# Altium PCB yhh.PcbDoc
Units mm, origin at the board's own origin, x right, y up, seen from the top; angles counter-clockwise.
Board outline 100 x 100 mm, 2 copper layers (Top Layer, Bottom Layer); 49 components, 70 nets, 270 pads, 114 vias.
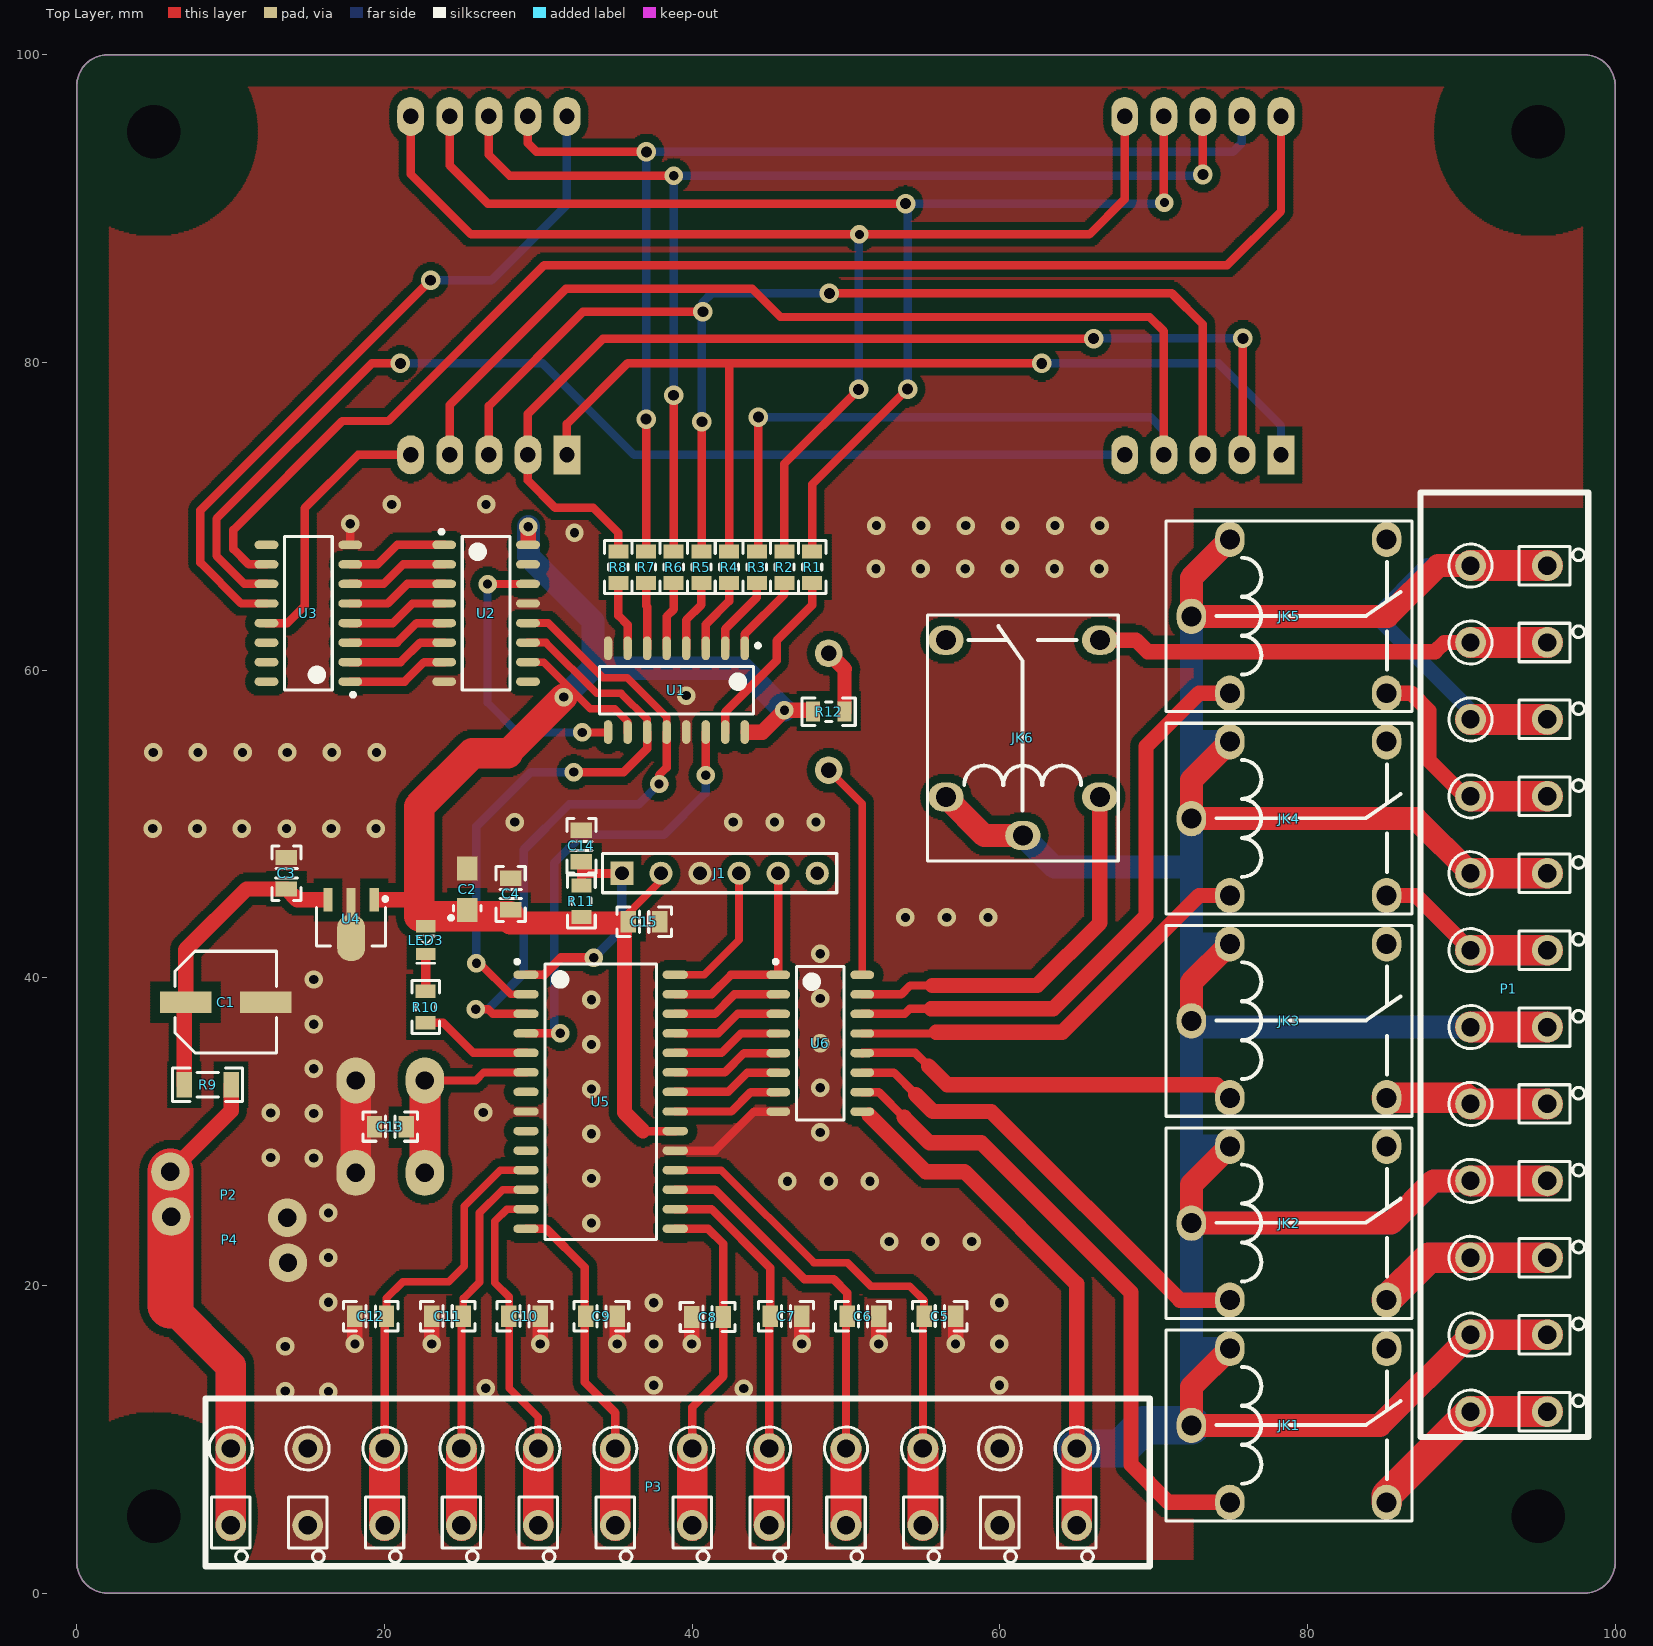
[diagram p0: Top Layer view]
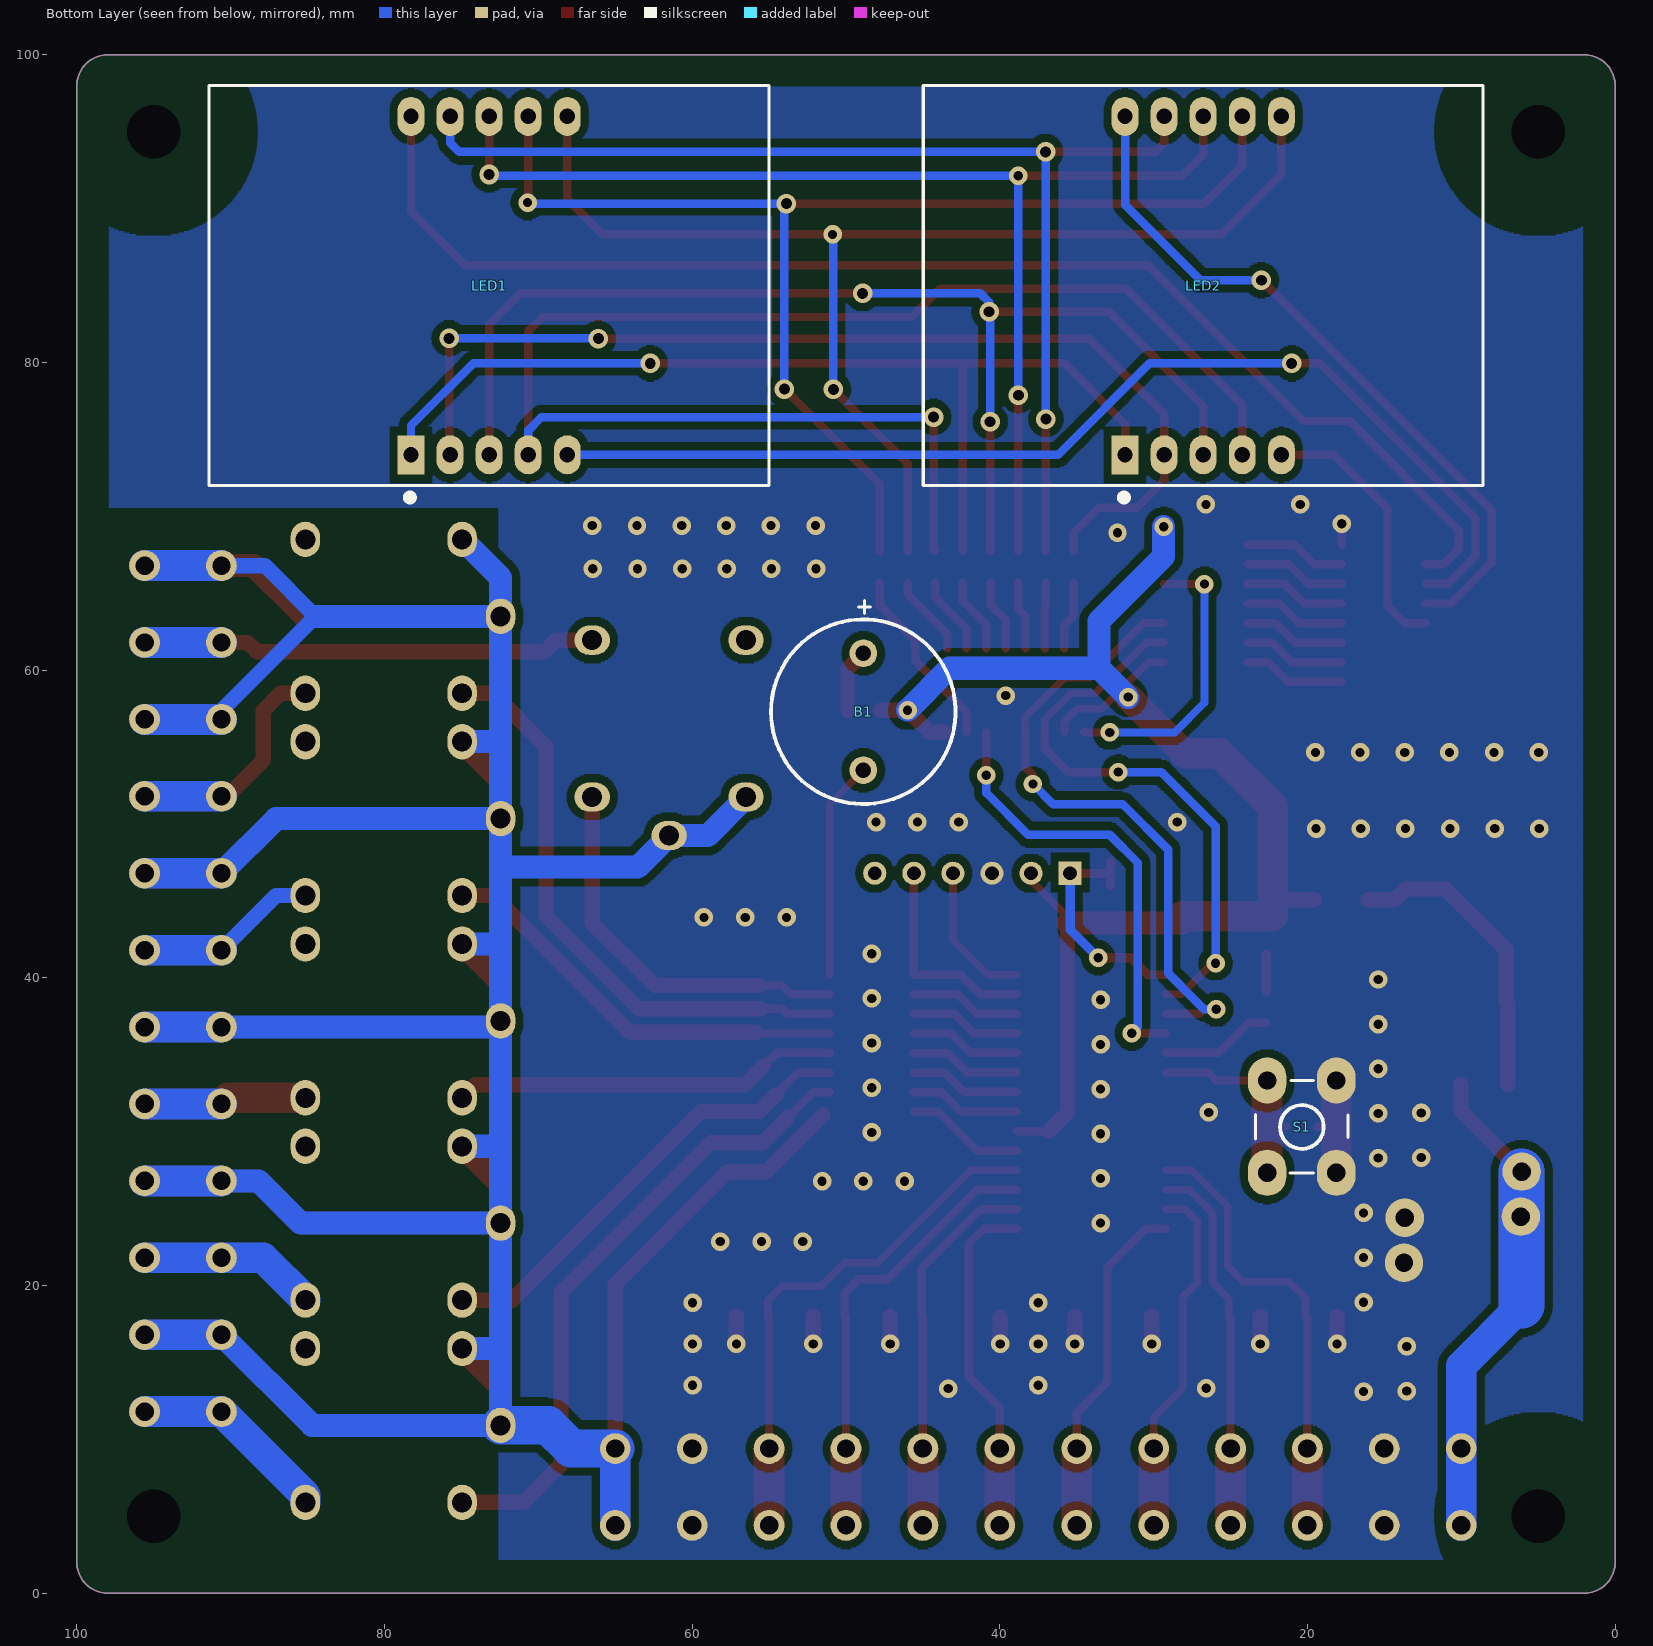
[diagram p1: Bottom Layer view, seen from below]

## Layer stack, top to bottom
Top Solder: solder mask 0.0102, Solder Resist, Dk 3.5
Top Layer: signal copper 0.0356
Dielectric 1: dielectric 0.32, FR-4, Dk 4.8
Bottom Layer: signal copper 0.0356
Bottom Solder: solder mask 0.0102, Solder Resist, Dk 3.5

## Board outline
0,2 0,98 cw(c2,98) 2,100 98,100 cw(c98,98) 100,98 100,2 cw(c98,2) 98,0 2,0 cw(c2,2)

## Design rules (kind name [scope] priority, off if disabled: settings)
Clearance Clearance_2 [IsKeepOut] p1: gap=2 ignorepadtopadclearanceinfootprint=FALSE
Clearance Clearance_1 [HasPad('Free-1')] p2: gap=5 ignorepadtopadclearanceinfootprint=FALSE
Clearance [All] p3: gap=0.5 ignorepadtopadclearanceinfootprint=FALSE except(0.6: SMDPad-Poly Poly-Poly)
PlaneConnect [All] p1: planeconnectstyle=Direct reliefexpansion=0.508 reliefentries=4 reliefconductorwidth=0.254 reliefairgap=0.254
PolygonConnect [All] p1: connectstyle=Direct reliefconductorwidth=0.254 reliefentries=4 polygonreliefangle="90 Angle" airgapwidth=0.254
RoutingVias [All] p1: holewidth=0.711 width=1.27 viastyle="Through Hole" minholewidth=0.711 minwidth=1.27 maxholewidth=0.711 maxwidth=1.27
SolderMaskExpansion [All] p1: expansion=0.102
Width [All] p1: maxlimit=5 minlimit=0.5 preferedwidth=0.55
29 further rules are at their usual default settings.

## Components (designator, comment, footprint, x,y, rotation, side; value= is the part's Value field where it differs from the comment)
B1 "BEEP" BUZZ 48.875,57.3 r270 bottom
C1 "Cap Pol" CAL6.3x8 9.675,38.425 r180 top value=100uF
C2 "Cap Pol" TA3216 25.375,45.75 r270 top value=100uF
C3 "0.1uF" C0805(2012) 13.625,46.8 r90 top
C4 "0.1uF" C0805(2012) 28.2,45.45 r90 top
C5 "0.1uF" C0805(2012) 56.1,18 r180 top
C6 "0.1uF" C0805(2012) 51.1,18 r0 top
C7 "0.1uF" C0805(2012) 46.1,18 r180 top
C8 "0.1uF" C0805(2012) 41,17.95 r0 top
C9 "0.1uF" C0805(2012) 34.1,18 r0 top
C10 "0.1uF" C0805(2012) 29.1,18 r180 top
C11 "0.1uF" C0805(2012) 24.1,18 r180 top
C12 "0.1uF" C0805(2012) 19.1,18 r0 top
C13 "0.1uF" C0805(2012) 20.375,30.325 r180 top
C14 "0.1uF" C0805(2012) 32.8,48.575 r90 top
C15 "0.1uF" C0805(2012) 36.875,43.65 r0 top
J1 "ISP" HDR1X6 41.78,46.8 r0 top
JK1 "SRB" RELAY_SRA 78.8,10.9 r180 top
JK2 "SRB" RELAY_SRA 78.8,24.05 r180 top
JK3 "SRB" RELAY_SRA 78.8,37.2 r180 top
JK4 "SRB" RELAY_SRA 78.8,50.35 r180 top
JK5 "SRB" RELAY_SRA 78.8,63.5 r180 top
JK6 "SRB" RELAY_SRA 61.5,55.6 r270 top
LED1 "Green" LED_KRS-8201CPG-3.5 73.2,85 r180 bottom
LED2 "Green" LED_KRS-8201CPG-3.5 26.78,85 r180 bottom
LED3 "LED" LED_0805 22.675,42.45 r90 top
P1 "Header 12" CON_DEGSON236_5_12P 93.1,39.3 r90 top
P2 "Header 2" HDR1X2 8.85,24.3 r180 top
P3 "Header 12" CON_DEGSON236_5_12P 37.5,6.9 r0 top
P4 "Header 12" HDR1X2 10.95,24.575 r0 top
R1 "330" R0805(2012) 47.8,66.7 r90 top
R2 "330" R0805(2012) 46,66.7 r90 top
R3 "330" R0805(2012) 44.2,66.7 r90 top
R4 "330" R0805(2012) 42.4,66.7 r90 top
R5 "330" R0805(2012) 40.6,66.7 r90 top
R6 "330" R0805(2012) 38.8,66.7 r90 top
R7 "330" R0805(2012) 37,66.7 r90 top
R8 "330" R0805(2012) 35.2,66.7 r90 top
R9 "100" R1206(3216) 8.5,33.05 r180 top
R10 "1K" R0805(2012) 22.675,38.1 r90 top
R11 "1K" R0805(2012) 32.8,44.975 r90 top
R12 "10" R0805(2012) 48.875,57.3 r0 top
S1 "SW-PB4" KEY_6x6 20.375,30.325 r270 bottom
U1 "74HC595" SOP16 38.975,58.7 r180 top
U2 "74HC595" SOP16 26.6,63.7 r270 top
U3 "ULN2003L" SOP16 15.05,63.7 r90 top
U4 "LM78L05" SOT89_3L 17.825,45 r90 top
U5 "PIC16F873A-I/SO" SOP28 34.05,31.945 r270 top
U6 "ULN2003L" SOP16 48.325,35.745 r270 top

## Footprints (in the part's own frame and the unit in brackets; to place one, negate y for a bottom-side part, rotate by r counter-clockwise, add the part's x,y. Pads: shape width x height; smd on the part's side, far side on the other; paste and mask are expansions set on the pad)
BUZZ [mm]
  round 1.8 hole 1: 1(-3.8,0) 2(3.8,0)
  silkscreen extent -7.23,-6 6,6
C0805(2012) [mm] "Chip Capacitor, 2-Leads, Body 2.00x1.25mm, IPC Medium Density"
  rect 1x1.4 smd: 1(-1.025,0) 2(1.025,0)
  silkscreen extent -1.78,-0.95 1.77,0.95
CAL6.3x8 [mm] "Aluminum Electrolytic Capacitor, Body 6.60x6.60x8.00mm, IPC High Density"
  rect 3.35x1.4 smd: 1(2.6,0) 2(-2.6,0)
  silkscreen extent -3.3,-3.3 3.3,3.3
CON_DEGSON236_5_12P [mm]
  round 2 hole 1.2 unplated: 1(-27.5,-2.5) 1(-27.5,2.5) 2(-22.5,-2.5) 2(-22.5,2.5) 3(-17.5,2.5) 3(-17.5,-2.5) 4(-12.5,-2.5) 4(-12.5,2.5) 5(-7.5,-2.5) 5(-7.5,2.5) 6(-2.5,-2.5) 6(-2.5,2.5) 7(2.5,2.5) 7(2.5,-2.5) 8(7.5,-2.5) 8(7.5,2.5) 9(12.5,2.5) 9(12.5,-2.5) 10(17.5,-2.5) 10(17.5,2.5) 11(22.5,2.5) 11(22.5,-2.5) 12(27.5,-2.5) 12(27.5,2.5)
  silkscreen extent -29.15,-5.15 32.25,5.75
HDR1X2 [mm] "Connector; Header; 2 Position"
  round 2.5 hole 1.2 paste+0: 1(-4.825,-0.1)
  round 2.5 hole 1.2: 2(2.775,-3.1)
HDR1X6 [mm] "Connector; Header; 6 Position"
  rect 1.5x1.5 hole 0.9: 1(-6.35,0)
  round 1.5 hole 0.9: 2(-3.81,0) 3(-1.27,0) 4(1.27,0) 5(3.81,0) 6(6.35,0)
  silkscreen extent -7.62,-1.27 7.62,1.27
KEY_6x6 [mm]
  oval 3x2.5 hole 1.2: 1(-3,-2.25) 1(3,-2.25) 2(-3,2.25) 2(3,2.25)
  silkscreen extent -3,-3 3,3
LED_0805 [mm]
  rect 0.8x1.25 smd: 1(0.9,0) 2(-0.9,0)
  silkscreen extent -1.5,-0.6 0.3,0.6
LED_KRS-8201CPG-3.5 [mm]
  rect 1.75x2.54 hole 1: 1(-5.08,-11)
  oval 1.75x2.54 hole 1: 2(-2.54,-11) 3(0,-11) 4(2.54,-11) 5(5.08,-11) 6(5.08,11) 7(2.54,11) 8(0,11) 9(-2.54,11) 10(-5.08,11)
  silkscreen extent -18.2,-13.97 18.2,13
R0805(2012) [mm] "Chip Resistor, 2-Leads, Body 2.00x1.25mm, IPC Medium Density"
  rect 0.9x1.3 smd: 1(-1.025,0) 2(1.025,0)
  silkscreen extent -1.73,-0.9 1.73,0.9
R1206(3216) [mm] "Chip Resistor, 2-Leads, Body 3.20x1.60mm, IPC Medium Density"
  rect 1x1.65 smd: 1(-1.525,0) 2(1.525,0)
  silkscreen extent -2.27,-1.1 2.28,1.1
RELAY_SRA [mm] "JK?"
  oval 1.9x2.3 hole 1.3: 1(6.35,0) 2(3.85,5) 3(-6.35,5) 4(-6.35,-5) 5(3.85,-5)
  silkscreen extent -8,-6.2 8,6.2
SOP16 [mm] "SOP, 16-Leads, Body 10.00x3.90mm, Pitch 1.27mm, IPC Medium Density"
  oval 0.55x1.55 smd: 1(-4.445,-2.725) 2(-3.175,-2.725) 3(-1.905,-2.725) 4(-0.635,-2.725) 5(0.635,-2.725) 6(1.905,-2.725) 7(3.175,-2.725) 8(4.445,-2.725) 9(4.445,2.725) 10(3.175,2.725) 11(1.905,2.725) 12(0.635,2.725) 13(-0.635,2.725) 14(-1.905,2.725) 15(-3.175,2.725) 16(-4.445,2.725)
  silkscreen extent -5.43,-3.02 5,1.55
SOP28 [mm] "SOP, 28-Leads, Body 17.90x7.50mm, Pitch 1.27mm, IPC Medium Density"
  oval 0.55x1.65 smd: 1(-8.255,-4.85) 2(-6.985,-4.85) 3(-5.715,-4.85) 4(-4.445,-4.85) 5(-3.175,-4.85) 6(-1.905,-4.85) 7(-0.635,-4.85) 8(0.635,-4.85) 9(1.905,-4.85) 10(3.175,-4.85) 11(4.445,-4.85) 12(5.715,-4.85) 13(6.985,-4.85) 14(8.255,-4.85) 15(8.255,4.85) 16(6.985,4.85) 17(5.715,4.85) 18(4.445,4.85) 19(3.175,4.85) 20(1.905,4.85) 21(0.635,4.85) 22(-0.635,4.85) 23(-1.905,4.85) 24(-3.175,4.85) 25(-4.445,4.85) 26(-5.715,4.85) 27(-6.985,4.85) 28(-8.255,4.85)
  silkscreen extent -9.22,-5.55 8.95,3.62
SOT89_3L [mm] "SOT89, 3-Leads, Body 4.50x2.45mm, Pitch 1.50mm, Lead Span 3.5mm - Reverse Pinning, IPC Medium Density"
  rect 1.5x0.6 smd: 1(0.075,-1.5) 3(0.075,1.5)
  rrect90% 3x1.8 smd: 2(-2.4,0)
  rect 1.8x0.6 smd: 2(-0.075,0)
  silkscreen extent -2.93,-2.35 0.25,2.25
TA3216 [mm] "Molded Capacitor, 2-Leads, Body 3.20x1.60mm, IPC Medium Density"
  rect 1.55x1.35 smd: 1(1.35,0) 2(-1.35,0)
  silkscreen extent 1.05,-1.17 1.97,0.9

## Part data
C1 C2: "极性钽电容", LatestRevisionDate=17-Jul-2002, LatestRevisionNote="Re-released for DXP Platform.", PackageReference=RB7.6-15, Published=8-Jun-2000, Publisher="Altium Limited"
  C1: Vol=50V
  C2: Vol=16V
C3 C4 C5 C6 C7 C8 C9 C10 C11 C12 C13 C14 C15: library part Cap, "无极性电容", LatestRevisionDate=17-Jul-2002, LatestRevisionNote="Re-released for DXP Platform.", Published=8-Jun-2000, Publisher="Altium Limited"
J1: library part ISP_5
JK1 JK2 JK3 JK4 JK5 JK6: "单刀双掷继电器"
LED1 LED2: library part LED_KRS-8201CPG-3.5, "共阴1寸LED", 段电压(10ｍA)=7
LED3: "发光二极管", LatestRevisionDate=08-Jul-2005, LatestRevisionNote="Mech Layer 1 removed.", PackageReference=LED-0, Published=8-Jun-2000, Publisher="Altium Limited"
P1 P3 P4: "Header, 12-Pin", LatestRevisionDate=17-Jul-2002, LatestRevisionNote="Re-released for DXP Platform.", Publisher="Altium Limited"
P2: "接插件", LatestRevisionDate=17-Jul-2002, LatestRevisionNote="Re-released for DXP Platform.", Publisher="Altium Limited"
R1 R2 R3 R4 R5 R6 R7 R8 R9 R10 R11 R12: library part Res, "Resistor", LatestRevisionDate=17-Jul-2002, PackageDescription="Axial Device, Thru-Hole; 2 Leads; 0.7 in Pin Spacing", Published=8-Jun-2000, Publisher="Altium Limited"
S1: "微动开关", LatestRevisionDate=17-Jul-2002, LatestRevisionNote="Re-released for DXP Platform.", PackageReference=SPST-2, Published=24-Mar-1999, Publisher="Altium Limited"
U1 U2: "移位寄存器", ComponentAvailability="Not for New Design", ComponentLink1Description="Manufacturer Link", ComponentLink1URL=http://www.onsemi.com/, ComponentLink2Description=Datasheet, ComponentLink2URL=http://www.onsemi.com/pub/Collateral/MC74VHC595-D.PDF, DatasheetVersion=1997, LatestRevisionDate=13-Apr-2006, LatestRevisionNote="IPC-7351 Footprint Added.", PackageDescription="16-Pin Small Outline Package 1.27 mm Pitch", PackageReference=966-01, PackageVersion=1997, Published=15-Apr-2002, Publisher="Altium Limited"
U3 U6: "驱动芯片", Code_IPC=SOIC127P600-16, Code_JEDEC=MS-012-AC, ComponentLink1Description="Manufacturer Link", ComponentLink1URL=http://www.allegromicro.com/, DatasheetVersion=1998, LatestRevisionDate=13-Apr-2006, LatestRevisionNote="IPC-7351 Footprint Added.", PackageDescription="16-Pin Small Outline Integrated Circuit 1.27 mm Pitch", PackageReference=L16, Published=13-Oct-2000, Publisher="Altium Limited"
U4: library part LM78LXX
U5: "Enhanced FLASH Microcontroller, 4K (x14-Bit words) FLASH, 192 Bytes RAM, 28-Pin SOIC, Standard VDD Range, Industrial Temperature", Supplier Part Number 1=PIC16F873A-I/SO-ND, Code_JEDEC=MS-013, ComponentAvailability="Unknown. Contact manufacturer to determine status.", ComponentLink1Description=Datasheet, ComponentLink1URL=http://ww1.microchip.com/downloads/en/DeviceDoc/39582b.pdf, ComponentLink2Description="Packaging Specification", ComponentLink2URL=http://www.microchip.com/stellent/groups/techpub_sg/documents/packagingspec/en012702.pdf, ComponentLink3Description="Microchip.com Home", ComponentLink3URL=http://www.microchip.com/, DatasheetVersion="revB, Oct-2003", LatestRevisionDate=29-Jan-2009, LatestRevisionNote="Sch. layout revised. 3D Model Removed.", PackageDescription="28-Lead Plastic Small Outline (SO) - Wide 7.50mm Body [SOIC]", PackageReference=SOIC-SO28, PackageVersion="revBB, Aug-2009", Published=11-Oct-2004, Publisher="Altium Limited", Supplier 1=Digi-Key, Supplier 2=Farnell, Supplier 3=Farnell, Supplier Part Number 2=1660034, Supplier Part Number 3=9761080

## Free pads (board coordinates)
  round 0 hole 3.5 unplated: 1(5,5) 1(5,95) 1(95,5) 1(95,95)

## Via types
v1: diameter 1.2, hole 0.6, Top Layer to Bottom Layer, tented both sides, 98 vias
v2: diameter 1.27, hole 0.711, Top Layer to Bottom Layer, tented both sides, 16 vias

## Nets (pads, with @x,y where several pads share a name; then routed paths per layer and width w, separated by ;. In a path a pad name is that pad's centre, name@x,y a point inside that pad or via, vN(x,y) a via of type N, cw(c..) or ccw(c..) an arc to the next point about the centre after c; other vN are vias at no path point)
+5: C2.1 C4.1 C15.1 J1.2 LED3.1 R11.1 R12.1 U1.10 U1.16 U2.10 U2.16 U4.1 U5.20 | length 102.4
  Top Layer w0.5: U2.10 30.35,60.525 33.375,57.5 34.955,57.5 35.8,56.655 U1.10 ; C15.1 35.85,44.185 37.97,46.305 J1.2
  Top Layer w0.55: 36.8,30.04 U5.20
  Top Layer w1: U4.1@19.55,45.075 22.225,45.075 22.25,45.05 ; U2.16@29.35,68.4 v1(29.35,69.325) ; v1@31.663,58.238 v1(31.65,58.25) v1@31.9,58.5 ; C15.1@35.599,43.75 35.599,31.241 36.8,30.04 ; U1.16@43.65,55.975 44.575,55.975 ; R12.1@47.75,57.4 v1(46,57.4) ; 44.575,55.975 v1(46,57.4) ; 44.575,55.975 v1(46,57.4)
  Top Layer w1.5: 28.175,43.575 C15.1@35.55,43.575
  Top Layer w1.8: 28,54.6 v1(31.65,58.25)
  Top Layer w2: 28,54.6 25.725,54.6 22.25,51.125 22.25,45.05 22.25,44 C4.1@28.125,44
  Bottom Layer w1: v1@31.663,58.238 v1(31.65,58.25) 33.558,60.159
  Bottom Layer w1.5: v1(29.35,69.325) 29.35,67.403 33.558,63.195 33.558,60.159 ; v1@31.663,58.238 33.55,60.125 43.275,60.125 v1(46,57.4)
+24: P2.2 P3.1 P4.1 R9.1 | length 56.5
  Top Layer w1: P2.2 10.025,31.35 R9.1
  Top Layer w2: 6.075,18.7 10,14.775 10,9.4 P3.1@10,4.4
  Top Layer w3: 6.075,18.7 6.075,24.475 P2.2
  Bottom Layer w2: 6.075,18.7 10,14.775 10,9.4 P3.1@10,4.4
  Bottom Layer w3: 6.075,18.7 P2.2
+24_D: JK1.1 JK1.5 JK2.1 JK2.5 JK3.1 JK3.5 JK4.1 JK4.5 JK5.1 JK5.5 JK6.1 JK6.5 P1.2 P1.4 P1.6 P1.8 P1.10 P1.12 P3.12 U6.9 | length 415.1
  Top Layer w1: U6.9@51.514,31.064 55.179,27.4 57.7,27.4 65,20.1 P3.12@65,9.4
  Top Layer w1.5: JK6.5 59,49.25 JK6.1 ; JK3.1 72.45,39.7 JK3.5 ; JK1.5 72.45,13.4 JK1.1 84.7,10.9 P1.2@90.6,16.8 ; JK2.5 72.45,26.55 JK2.1 85.441,24.05 88.191,26.8 P1.4@90.6,26.8 ; JK4.5 72.45,52.85 JK4.1 87.05,50.35 P1.8@90.6,46.8 ; JK5.5 72.45,66 JK5.1 85.2,63.5 88.5,66.8 P1.12@90.6,66.8
  Top Layer w2: P3.12@65,4.4 P3.12@65,9.4 ; P1.2@90.6,16.8 P1.2@95.6,16.8 ; P1.4@90.6,26.8 P1.4@95.6,26.8 ; P1.6@90.6,36.8 P1.6@95.6,36.8 ; P1.8@90.6,46.8 P1.8@95.6,46.8 ; P1.10@90.6,56.8 P1.10@95.6,56.8 ; P1.12@90.6,66.8 P1.12@95.6,66.8
  Bottom Layer w1: JK3.1 JK3.1@72.85,36.8 ; P1.10@90.6,56.8 90.6,57.375 84.475,63.5 87.775,66.8 P1.12@90.6,66.8
  Bottom Layer w1.5: JK6.5 59,49.25 JK6.1 63.55,47.2 72.45,47.2 ; JK3.1@72.85,36.8 P1.6@90.6,36.8 ; JK1.5 72.475,15.9 72.45,15.875 ; JK2.5 72.45,29.05 ; JK3.5 72.45,42.2 ; JK4.5 72.475,55.35 72.45,55.325 ; JK5.5 72.45,66 JK5.1 ; 84.475,63.5 JK5.1 ; P1.2@90.6,16.8 84.7,10.9 JK1.1 72.45,15.875 ; P1.4@90.6,26.8 88.197,26.8 85.447,24.05 JK2.1 ; P1.8@90.6,46.8 87.05,50.35 JK4.1 ; 72.45,15.875 JK2.1 ; JK2.1 72.45,29.05 ; 72.45,29.05 JK3.1 72.45,42.2 ; 72.45,42.2 72.45,47.2 ; 72.45,47.2 JK4.1 ; JK4.1 72.45,55.325 ; 72.45,55.325 JK5.1
  Bottom Layer w2: P3.12@65,4.4 P3.12@65,9.4 ; P1.2@90.6,16.8 P1.2@95.6,16.8 ; P1.4@90.6,26.8 P1.4@95.6,26.8 ; P1.6@90.6,36.8 P1.6@95.6,36.8 ; P1.8@90.6,46.8 P1.8@95.6,46.8 ; P1.10@90.6,56.8 P1.10@95.6,56.8 ; P1.12@90.6,66.8 P1.12@95.6,66.8
  Bottom Layer w2.5: P3.12@65,9.4 67.85,9.4 69.35,10.9 JK1.1
a: R1.1 U1.15 | length 12
  Top Layer w0.55: U1.15 42.15,57.275 45.5,60.625 45.5,61.925 47.8,64.225 R1.1
b: R2.1 U1.1 | length 5.3
  Top Layer w0.55: U1.1 43.42,62.345 46,64.925 R2.1
c: R3.1 U1.2 | length 5.1
  Top Layer w0.55: U1.2 42.15,62.675 44.2,64.725 R3.1
com1: LED1.10 U3.10 | length 86.7
  Top Layer w0.55: U3.10 11.175,66.875 10.175,67.875 10.175,69.125 17.25,76.2 20.25,76.2 30.375,86.325 74.775,86.325 78.28,89.83 LED1.10
com2: LED1.5 U3.11 | length 72.1
  Top Layer w0.55: U3.11 10.895,65.605 9.075,67.425 9.075,69.85 19.175,79.95 v2(21.025,79.95)
  Bottom Layer w0.55: v2(21.025,79.95) 30.275,79.95 36.225,74 LED1.5
com3: LED2.10 U3.12 | length 46.6
  Top Layer w0.55: U3.12 10.68,64.335 8.025,66.99 8.025,70.394 22.981,85.35 v2(23,85.35)
  Bottom Layer w0.55: v2(23,85.35) 26.95,85.35 31.86,90.26 LED2.10
com4: LED2.5 U3.13 | length 17.6
  Top Layer w0.55: U3.13 13.69,63.065 14.8,64.175 14.8,70.525 18.275,74 LED2.5
d: R4.1 U1.3 | length 4.9
  Top Layer w0.55: U1.3 40.88,62.969 42.4,64.489 R4.1
Down: C6.1 P3.9 U5.17 | length 29.1
  Top Layer w0.55: U5.17 41.47,26.23 47.3,20.4 49.2,20.4 50.075,19.525 C6.1 50,17.925 P3.9@50,9.4
  Top Layer w2: P3.9@50,4.4 P3.9@50,9.4
dp: R8.1 U1.7 | length 4.5
  Top Layer w0.55: R8.1 35.2,63.55 35.8,62.95 U1.7
e: R5.1 U1.4 | length 4.7
  Top Layer w0.55: U1.4 39.61,63.26 40.6,64.25 R5.1
f: R6.1 U1.5 | length 4.4
  Top Layer w0.55: U1.5 38.34,63.49 38.8,63.95 R6.1
g: R7.1 U1.6 | length 4.3
  Top Layer w0.55: R7.1 37,64.2 37.075,64.125 37.07,64.125 37.07,61.43 U1.6
GND: C1.2 C2.2 C3.2 C4.2 C5.1 C6.2 C7.1 C8.1 C9.2 C10.1 C11.2 C12.1 C13.2 C14.2 C15.2 J1.3 P2.1 P3.2 P3.11 P4.2 S1.2 U1.8 U1.13 U2.8 U2.13 U3.8 U4.2 U5.8 U5.19 U6.8 | length 30.7
  Top Layer w0.55: U3.8 v1(17.775,69.525) ; 18.125,30.325 C13.2 ; U5.19 41.495,28.77 44.025,31.3 U6.8
  Top Layer w1: v1(18.075,16.2) C12.1 ; v1(23.075,16.2) C11.2 ; v1(30.125,16.2) C10.1 ; v1(35.125,16.2) C9.2 ; v1(39.975,16.2) C8.1 ; v1(47.125,16.2) C7.1 ; v1(52.125,16.2) C6.2 ; v1(57.125,16.2) C5.1
  Top Layer w2: S1.2@18.125,27.325 18.125,30.325 S1.2@18.125,33.325
  other v1: 16.35,13.1 13.55,13.133 43.35,13.3 26.575,13.325 37.5,13.517 59.975,13.517 13.55,16.037 37.5,16.2 59.975,16.2 37.5,18.883 59.975,18.883 16.35,18.907 16.35,21.81 52.808,22.85 55.492,22.85 58.175,22.85 33.45,24.058 16.35,24.713 46.192,26.775 48.875,26.775 51.558,26.775 33.45,26.962 15.4,28.278 12.6,28.312 33.45,29.865 48.325,29.95 15.4,31.182 12.6,31.215 26.425,31.25 33.45,32.768 48.325,32.853 15.4,34.085 33.45,35.672 48.325,35.757 15.4,36.988 33.45,38.575 48.325,38.66 15.4,39.892 48.325,41.563 53.867,43.925 56.55,43.925 59.233,43.925 4.925,49.7 7.828,49.7 10.732,49.7 13.635,49.7 16.538,49.7 19.442,49.7 28.458,50.125 42.675,50.125 45.358,50.125 48.042,50.125 4.968,54.65 7.872,54.65 10.775,54.65 13.678,54.65 16.582,54.65 19.485,54.65 39.61,58.35 51.942,66.6 54.845,66.6 57.748,66.6 60.652,66.6 63.555,66.6 66.458,66.6 32.35,68.933 51.975,69.4 54.878,69.4 57.782,69.4 60.685,69.4 63.588,69.4 66.492,69.4 20.475,70.775 26.6,70.775
Head: JK3.2 U6.12 | length 25.1
  Top Layer w0.55: U6.12 51.05,35.12 54.505,35.12 55.363,34.263
  Top Layer w1: 55.363,34.263 56.575,33.05 74.1,33.05 JK3.2
Head_O: JK3.3 P1.5 | length 15.6
  Top Layer w2: JK3.3 90.2,32.2 90.6,31.8 P1.5@95.6,31.8
  Bottom Layer w2: P1.5@90.6,31.8 P1.5@95.6,31.8
Manual/Auto: C8.2 P3.7 U5.15 | length 22.7
  Top Layer w0.55: U5.15 41.04,23.69 42.025,22.705 C8.2 42.025,14.1 40,12.075 P3.7@40,9.4
  Top Layer w2: P3.7@40,4.4 P3.7@40,9.4
"Motor starting": C10.2 P3.5 U5.13 | length 23.3
  Top Layer w0.5: U5.13 27.96,24.96 27.175,24.175 27.175,20.175 28.1,19.25 28.1,18 28.1,13.325 30,11.425 P3.5@30,9.4
  Top Layer w2: P3.5@30,4.4 P3.5@30,9.4
"Motor stop": C9.1 P3.6 U5.14 | length 22.5
  Top Layer w0.55: U5.14 30.51,23.69 33.025,21.175 33.025,18 33.025,13.7 35,11.725 P3.6@35,9.4
  Top Layer w2: P3.6@35,4.4 P3.6@35,9.4
NC1: JK4.2 U6.13 | length 27.6
  Top Layer w0.55: U6.13 55.78,36.38 55.85,36.45
  Top Layer w1: 55.85,36.45 64.05,36.45 72.95,45.35 JK4.2
NC1_O: JK4.3 P1.7 | length 23.8
  Top Layer w1: JK4.3 87.05,45.35 P1.7@90.6,41.8
  Top Layer w2: P1.7@90.6,41.8 P1.7@95.6,41.8
  Bottom Layer w1: JK4.3 87.05,45.35 P1.7@90.6,41.8
  Bottom Layer w2: P1.7@90.6,41.8 P1.7@95.6,41.8
NC2: JK6.2 U6.15 | length 25.6
  Top Layer w0.55: U6.15 53.592,38.92 54.172,39.5 55.6,39.5
  Top Layer w1: 55.6,39.5 62.425,39.5 66.5,43.575 JK6.2
NC2_O: JK5.3 P1.9 | length 20.1
  Top Layer w1: JK5.3 86.75,58.5 87.875,57.375 87.875,54.175 90.25,51.8 P1.9@90.6,51.8
  Top Layer w2: P1.9@90.6,51.8 P1.9@95.6,51.8
  Bottom Layer w2: P1.9@90.6,51.8 P1.9@95.6,51.8
NC3: JK5.2 U6.14 | length 39
  Top Layer w0.55: U6.14 53.807,37.65 54.157,38 55.525,38
  Top Layer w1: 55.525,38 63.479,38 69.5,44.021 69.5,55.05 72.95,58.5 JK5.2
NC3_O: JK6.3 P1.11 | length 34.7
  Top Layer w1: JK6.3 68.85,61.95 69.6,61.2 88.3,61.2 88.9,61.8 P1.11@90.6,61.8
  Top Layer w2: P1.11@90.6,61.8 P1.11@95.6,61.8
  Bottom Layer w2: P1.11@90.6,61.8 P1.11@95.6,61.8
NetB1_1: B1.1 R12.2 | length 4.2
  Top Layer w0.9: R12.2 49.9,60.075
  Top Layer w1: B1.1 49.9,60.075
NetB1_2: B1.2 U6.16 | length 14.2
  Top Layer w0.5: B1.2 51.05,51.325 U6.16
NetC1_1: C1.1 C3.1 R9.2 U4.3 | length 19.8
  Top Layer w0.55: C1.1@6.975,38.325 C1.1
  Top Layer w1: R9.2 C1.1@6.975,38.325 ; C1.1 7.075,41.825 11.025,45.775 C3.1 14.325,45.075 U4.3@16.1,45.075
NetC14_1: C14.1 J1.1 R11.2 U5.1 | length 15.5
  Top Layer w0.55: U5.1 30.375,40.2
  Top Layer w0.6: 30.375,40.2 31.475,41.3 v1(33.6,41.3) ; R11.2 32.8,46.775 ; C14.1 32.8,46.775 ; J1.1@35.6,46.8 35.575,46.775 32.8,46.775
  Bottom Layer w0.6: v1(33.6,41.3) 35.425,43.125 35.425,46.625 J1.1@35.6,46.8
NetLED1_1: LED1.1 LED2.1 R4.2 | length 65.9
  Top Layer w0.55: LED2.1 31.86,76.01 35.8,79.95 v2(62.725,79.95) ; R4.2 42.4,79.95
  Bottom Layer w0.55: v2(62.725,79.95) 74.225,79.95 78.28,75.895 LED1.1
NetLED1_2: LED1.2 LED2.2 R8.2 | length 69.2
  Top Layer w0.55: R8.2 35.2,68.925 33.575,70.55 31.1,70.55 29.32,72.33 LED2.2 29.32,76.67 34.2,81.55 v2(66.1,81.55) ; LED1.2 75.65,74.09 76,74.44 75.8,74.64 v2(75.8,81.575)
  Bottom Layer w0.55: v2(66.1,81.55) 66.125,81.575 v2(75.8,81.575)
NetLED1_3: LED1.3 LED2.3 R5.2 | length 78
  Top Layer w0.55: LED2.3 26.78,77.18 32.9,83.3 v2(40.7,83.3) ; R5.2 40.7,67.825 40.625,67.9 v2(40.625,76.15) ; v2(48.925,84.5) 71.175,84.5 73.2,82.475 LED1.3
  Bottom Layer w0.55: v2(40.625,76.15) 40.625,83.225 v2(40.7,83.3) 40.7,83.925 41.275,84.5 v2(48.925,84.5)
NetLED1_4: LED1.4 LED2.4 R3.2 | length 99
  Top Layer w0.55: LED2.4 24.24,77.24 31.785,84.785 43.915,84.785 45.74,82.96 69.74,82.96 70.66,82.04 LED1.4 ; R3.2 44.3,67.825 v2(44.3,76.45)
  Bottom Layer w0.55: v2(44.3,76.45) 69.8,76.45 70.66,75.59 LED1.4
NetLED1_6: LED1.6 LED2.6 R2.2 | length 80.7
  Top Layer w0.55: LED2.6 21.7,92.25 25.625,88.325 v1(50.875,88.325) 65.825,88.325 68.12,90.62 LED1.6 ; R2.2 46,73.425 v2(50.825,78.25)
  Bottom Layer w0.55: v2(50.825,78.25) 50.825,88.275 v1(50.875,88.325)
NetLED1_7: LED1.7 LED2.7 R1.2 | length 81.7
  Top Layer w0.55: LED2.7 24.24,92.81 26.725,90.325 v2(53.875,90.325) ; R1.2 47.8,72.075 v2(54,78.275) ; LED1.7 70.66,90.44 v1(70.7,90.4)
  Bottom Layer w0.55: v2(54,78.275) 54,90.2 v2(53.875,90.325) 70.625,90.325 v1(70.7,90.4) v1@70.7,90.25
NetLED1_8: LED1.8 LED2.8 R6.2 | length 77.8
  Top Layer w0.55: LED2.8 26.78,93.495 28.125,92.15 v1(38.8,92.15) ; R6.2 v2(38.8,77.875) ; v2(73.2,92.225) 73.2,95.75 73.075,95.875 LED1.8
  Bottom Layer w0.55: v2(38.8,77.875) v1(38.8,92.15) 73.125,92.15 v2(73.2,92.225)
NetLED1_9: LED1.9 LED2.9 R7.2 | length 76.3
  Top Layer w0.55: LED2.9 29.32,94.255 29.875,93.7 v2(37.025,93.7) ; R7.2 v2(37,76.325)
  Bottom Layer w0.55: v2(37,76.325) 37,93.675 v2(37.025,93.7) 75.15,93.7 75.74,94.29 LED1.9
NetLED3_2: LED3.2 R10.2 | length 2.4
  Top Layer w0.6: R10.2 LED3.2
NetR10_1: R10.1 U5.5 | length 7.3
  Top Layer w0.55: R10.1 23.825,37.075 25.78,35.12 U5.5
NetU1_9: U1.9 U2.14 | length 19
  Top Layer w0.5: v1(26.7,65.6) 29.32,65.6 U2.14 ; v1(32.85,55.95) 34.53,55.95 U1.9
  Bottom Layer w0.5: v1(26.7,65.6) 26.7,57.875 28.625,55.95 v1(32.85,55.95)
NetU1_11: U1.11 U2.11 U5.2 | length 37.8
  Top Layer w0.5: v1@26.175,40.95 28.2,38.925 29.28,38.925 U5.2 ; U2.11 30.494,61.795 33.789,58.5 35.369,58.5 37.07,56.799 U1.11
  Top Layer w0.55: v1(32.3,53.375) 35.55,53.375 37.07,54.895 U1.11
  Bottom Layer w0.55: v1(25.975,40.95) 25.975,49.85 29.425,53.3 29.5,53.375 v1(32.3,53.375)
NetU1_12: U1.12 U2.12 U5.3 | length 42.6
  Top Layer w0.5: U2.12 30.638,63.065 34.203,59.5 35.783,59.5 38.34,56.943 U1.12
  Top Layer w0.55: v1(25.925,37.95) 26.75,37.95 27.04,37.66 U5.3 ; v1(37.85,52.6) 38.175,52.6 37.85,52.925 37.85,53.175 38.34,53.665 U1.12
  Bottom Layer w0.55: v1(25.925,37.95) 26.707,37.95 27.357,38.6 29.05,40.293 29.05,48.325 32,51.275 36.525,51.275 v1(37.85,52.6)
NetU1_14: U1.14 U5.4 | length 29.2
  Top Layer w0.55: U5.4 31.415,36.39 v1(31.425,36.4) ; v1(40.875,53.175) 40.875,55.945 U1.14
  Bottom Layer w0.55: v1@31.415,36.39 v1(31.425,36.4) 31.025,36.8 31.025,47.475 32.85,49.3 38.167,49.3 40.875,52.008 v1(40.875,53.175)
NetU2_1: U2.1 U3.7 | length 6.6
  Top Layer w0.55: U3.7 19.55,66.875 20.82,68.145 U2.1
NetU2_2: U2.2 U3.6 | length 6.6
  Top Layer w0.55: U3.6 19.94,65.605 21.21,66.875 U2.2
NetU2_3: U2.3 U3.5 | length 6.6
  Top Layer w0.55: U3.5 20.21,64.335 21.48,65.605 U2.3
NetU2_4: U2.4 U3.4 | length 6.6
  Top Layer w0.55: U3.4 20.54,63.065 21.81,64.335 U2.4
NetU2_5: U2.5 U3.3 | length 6.6
  Top Layer w0.55: U3.3 20.82,61.795 22.09,63.065 U2.5
NetU2_6: U2.6 U3.2 | length 6.6
  Top Layer w0.55: U3.2 21.05,60.525 22.32,61.795 U2.6
NetU2_7: U2.7 U3.1 | length 6.6
  Top Layer w0.55: U3.1 21.305,59.255 22.575,60.525 U2.7
NetU5_21: U5.21 U6.7 | length 7.2
  Top Layer w0.55: U5.21 42.55,31.31 43.81,32.57 U6.7
NetU5_22: U5.22 U6.6 | length 7.2
  Top Layer w0.55: U5.22 42.335,32.58 43.595,33.84 U6.6
NetU5_23: U5.23 U6.5 | length 7.2
  Top Layer w0.55: U5.23 42.12,33.85 43.38,35.11 U6.5
NetU5_24: U5.24 U6.4 | length 7.2
  Top Layer w0.55: U5.24 41.905,35.12 43.165,36.38 U6.4
NetU5_25: U5.25 U6.3 | length 7.2
  Top Layer w0.55: U5.25 41.69,36.39 42.95,37.65 U6.3
NetU5_26: U5.26 U6.2 | length 7.2
  Top Layer w0.55: U5.26 41.476,37.66 42.735,38.92 U6.2
OK: C13.1 S1.1 U5.6 | length 14
  Top Layer w0.5: C13.1 22.625,30.325 ; S1.1@22.625,33.325 25.925,33.325 26.45,33.85 U5.6
  Top Layer w2: S1.1@22.625,27.325 22.625,30.325 S1.1@22.625,33.325
PGC: J1.5 U5.27 U6.1 | length 13.8
  Top Layer w0.55: U5.27 41.261,38.93 42.521,40.19 U6.1 45.6,46.79 J1.5
PGD: J1.4 U5.28 | length 9.4
  Top Layer w0.5: U5.28 40.775,40.2 43.05,42.475 J1.4
Start-up: C11.1 P3.4 U5.12 | length 24.5
  Top Layer w0.5: P3.4@25,9.4 25,17.875 C11.1 25.125,19.15 26.175,20.2 26.175,24.725 27.68,26.23 U5.12
  Top Layer w2: P3.4@25,4.4 P3.4@25,9.4
Start/Stop: JK2.2 U6.11 | length 30
  Top Layer w0.55: U6.11 53.11,33.84 54.535,32.415
  Top Layer w1: 54.535,32.415 55.64,31.31 59.44,31.31 71.7,19.05 JK2.2
Start/Stop_O: JK2.3 P1.3 | length 23.2
  Top Layer w2: JK2.3 87.9,21.8 90.6,21.8 P1.3@95.6,21.8
  Bottom Layer w2: JK2.3 87.9,21.8 90.6,21.8 P1.3@95.6,21.8
Stop: C12.2 P3.3 U5.11 | length 29.6
  Top Layer w0.5: C12.2 20.125,19.175 21.2,20.25 24.175,20.25 25.175,21.25 25.175,25.14 27.535,27.5 U5.11
  Top Layer w0.55: P3.3@20,9.4 20,17.875 C12.2
  Top Layer w2: P3.3@20,4.4 P3.3@20,9.4
Up: C7.2 P3.8 U5.16 | length 24.5
  Top Layer w0.55: U5.16 41.255,24.96 45.075,21.14 C7.2 45,17.925 P3.8@45,9.4
  Top Layer w2: P3.8@45,4.4 P3.8@45,9.4
Up/Down: JK1.2 U6.10 | length 41.5
  Top Layer w0.55: U6.10 52.13,32.57 53.775,30.925
  Top Layer w1: 53.775,30.925 55.425,29.275 58.8,29.275 68.525,19.55 68.525,8.35 70.975,5.9 JK1.2
Up/Down_O: JK1.3 P1.1 | length 26.3
  Top Layer w2: JK1.3 85.15,6.35 90.6,11.8 P1.1@95.6,11.8
  Bottom Layer w2: JK1.3 85.15,6.35 90.6,11.8 P1.1@95.6,11.8
"Urgent stop": C5.2 P3.10 U5.18 | length 34.3
  Top Layer w0.5: U5.18 41.9,27.5 47.925,21.475 50.1,21.475 51.625,19.95 54.15,19.95 55.075,19.025 C5.2 55,17.925 P3.10@55,9.4
  Top Layer w2: P3.10@55,4.4 P3.10@55,9.4
pads on no net: J1.6 JK1.4 JK2.4 JK3.4 JK4.4 JK5.4 JK6.4 U2.9 U2.15 U3.9 U3.14 U3.15 U3.16 U5.7 U5.9 U5.10

## Polygon pours and split planes (outlines as drawn)
GND on Bottom Layer "GND_L02_P006" (hatched Horizontal grid 0.1 track 0.1, remove dead copper, pour order 6): 1.05,0.925 99.125,0.925 99.125,99 1.05,99
GND on Top Layer "GND_L01_P004" (hatched Horizontal grid 0.1 track 0.1, remove dead copper, pour order 4): 0.775,99.2 99.65,99.2 99.65,0.9 0.775,0.9

## Keep-outs
Keep-Out Layer:
  the board outline again, w0.1

## Other copper
Top Layer:
  pour cut-out: 72.575,70.525 98.275,70.525 98.275,1.125 72.575,1.125
Bottom Layer:
  pour cut-out: 72.575,70.5 98.275,70.5 98.275,1.125 72.575,1.125

## Dimensions
0,2 to 100,2 on Mechanical 1
2,0 to 2,100 on Mechanical 1